# EAGLE board proiect2025 v21_pcb (EAGLE 9.7.0)
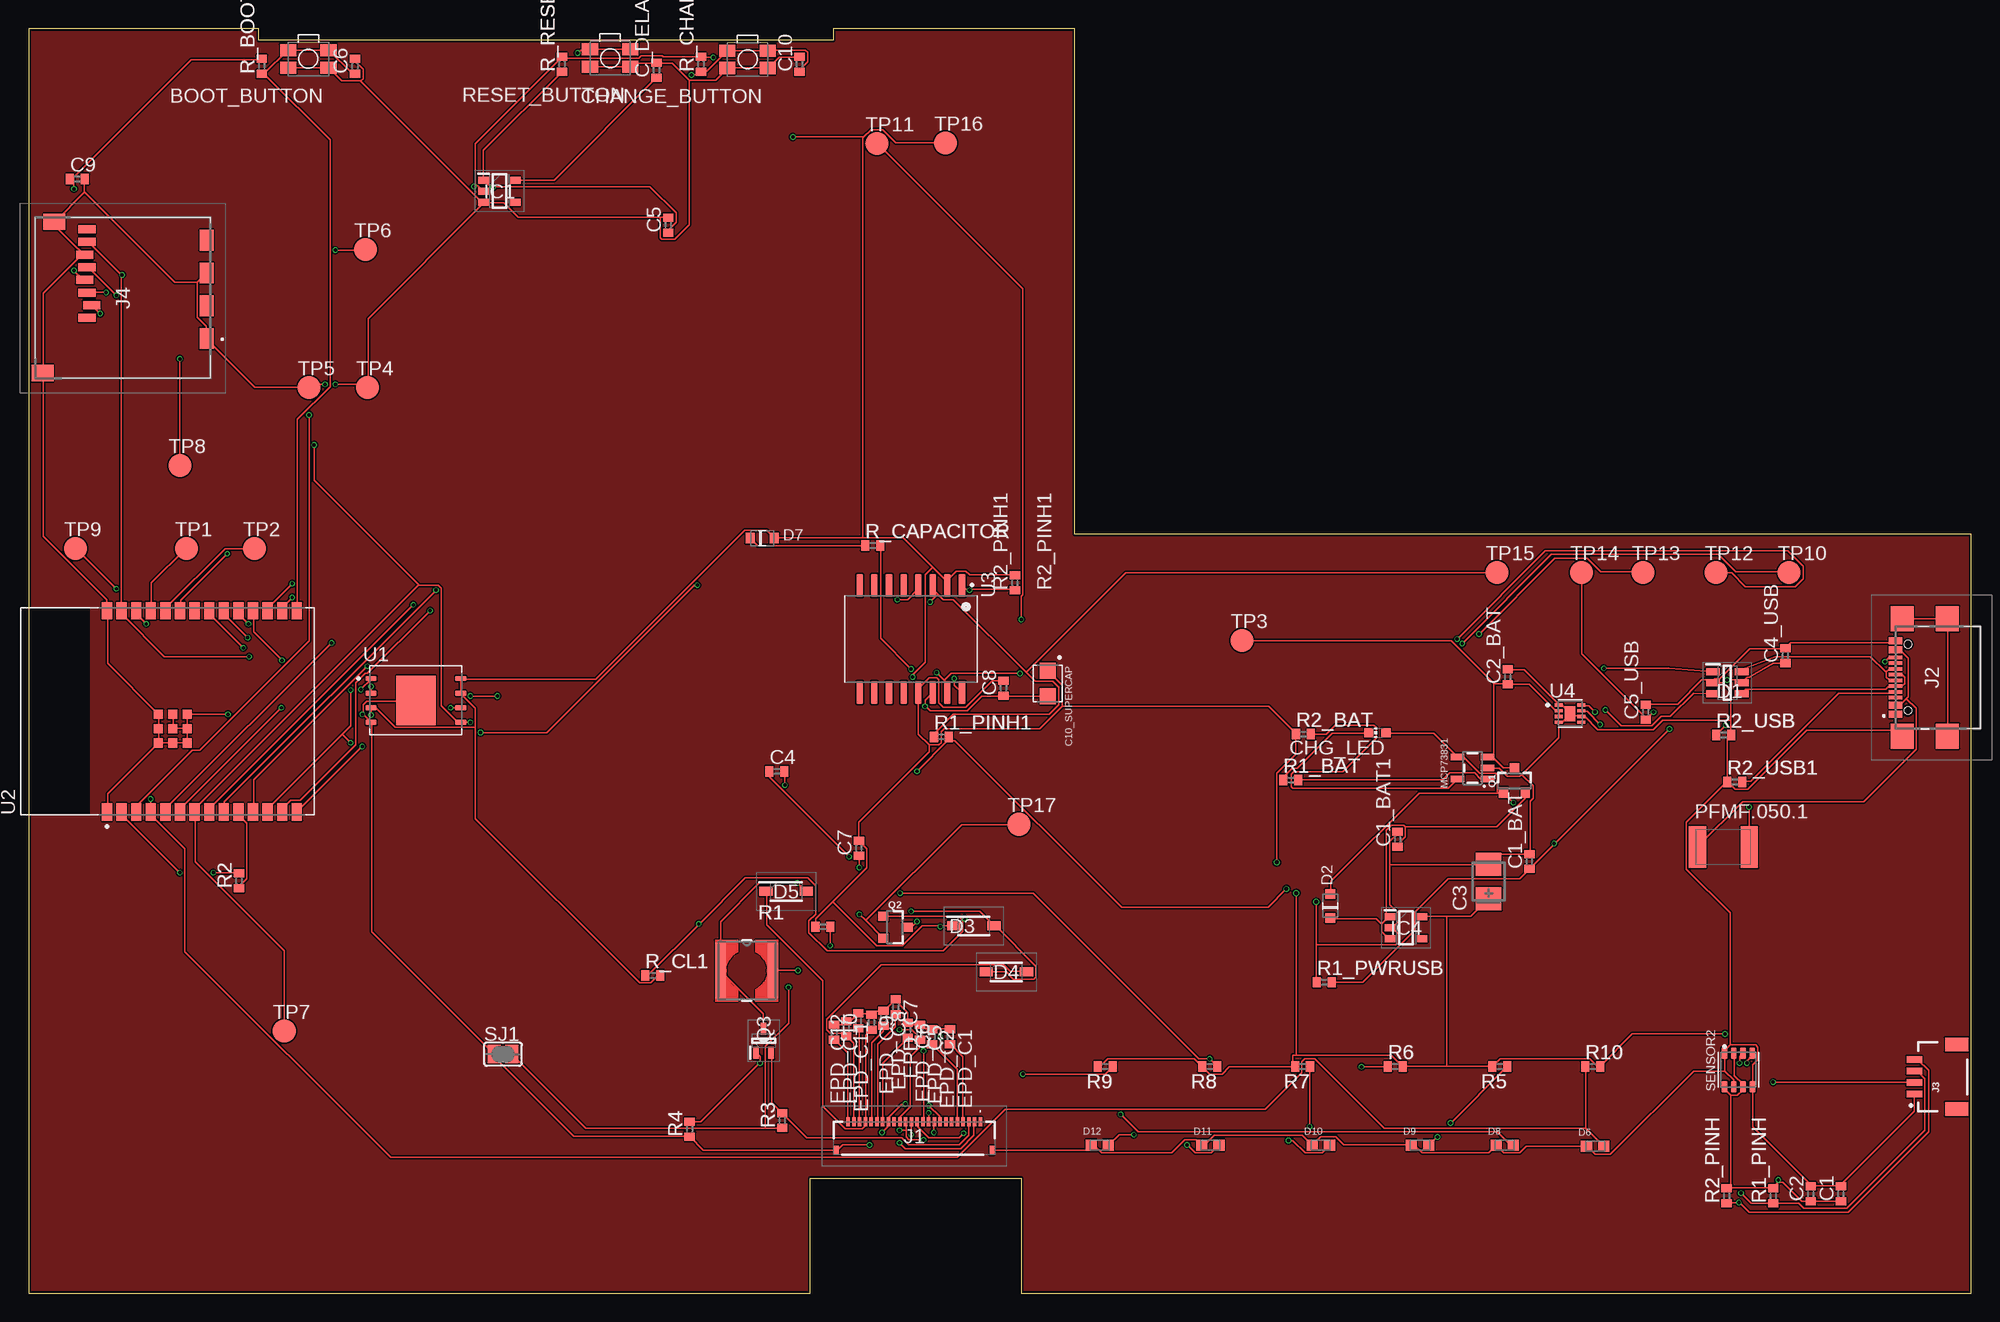
[diagram p0: board, top side]
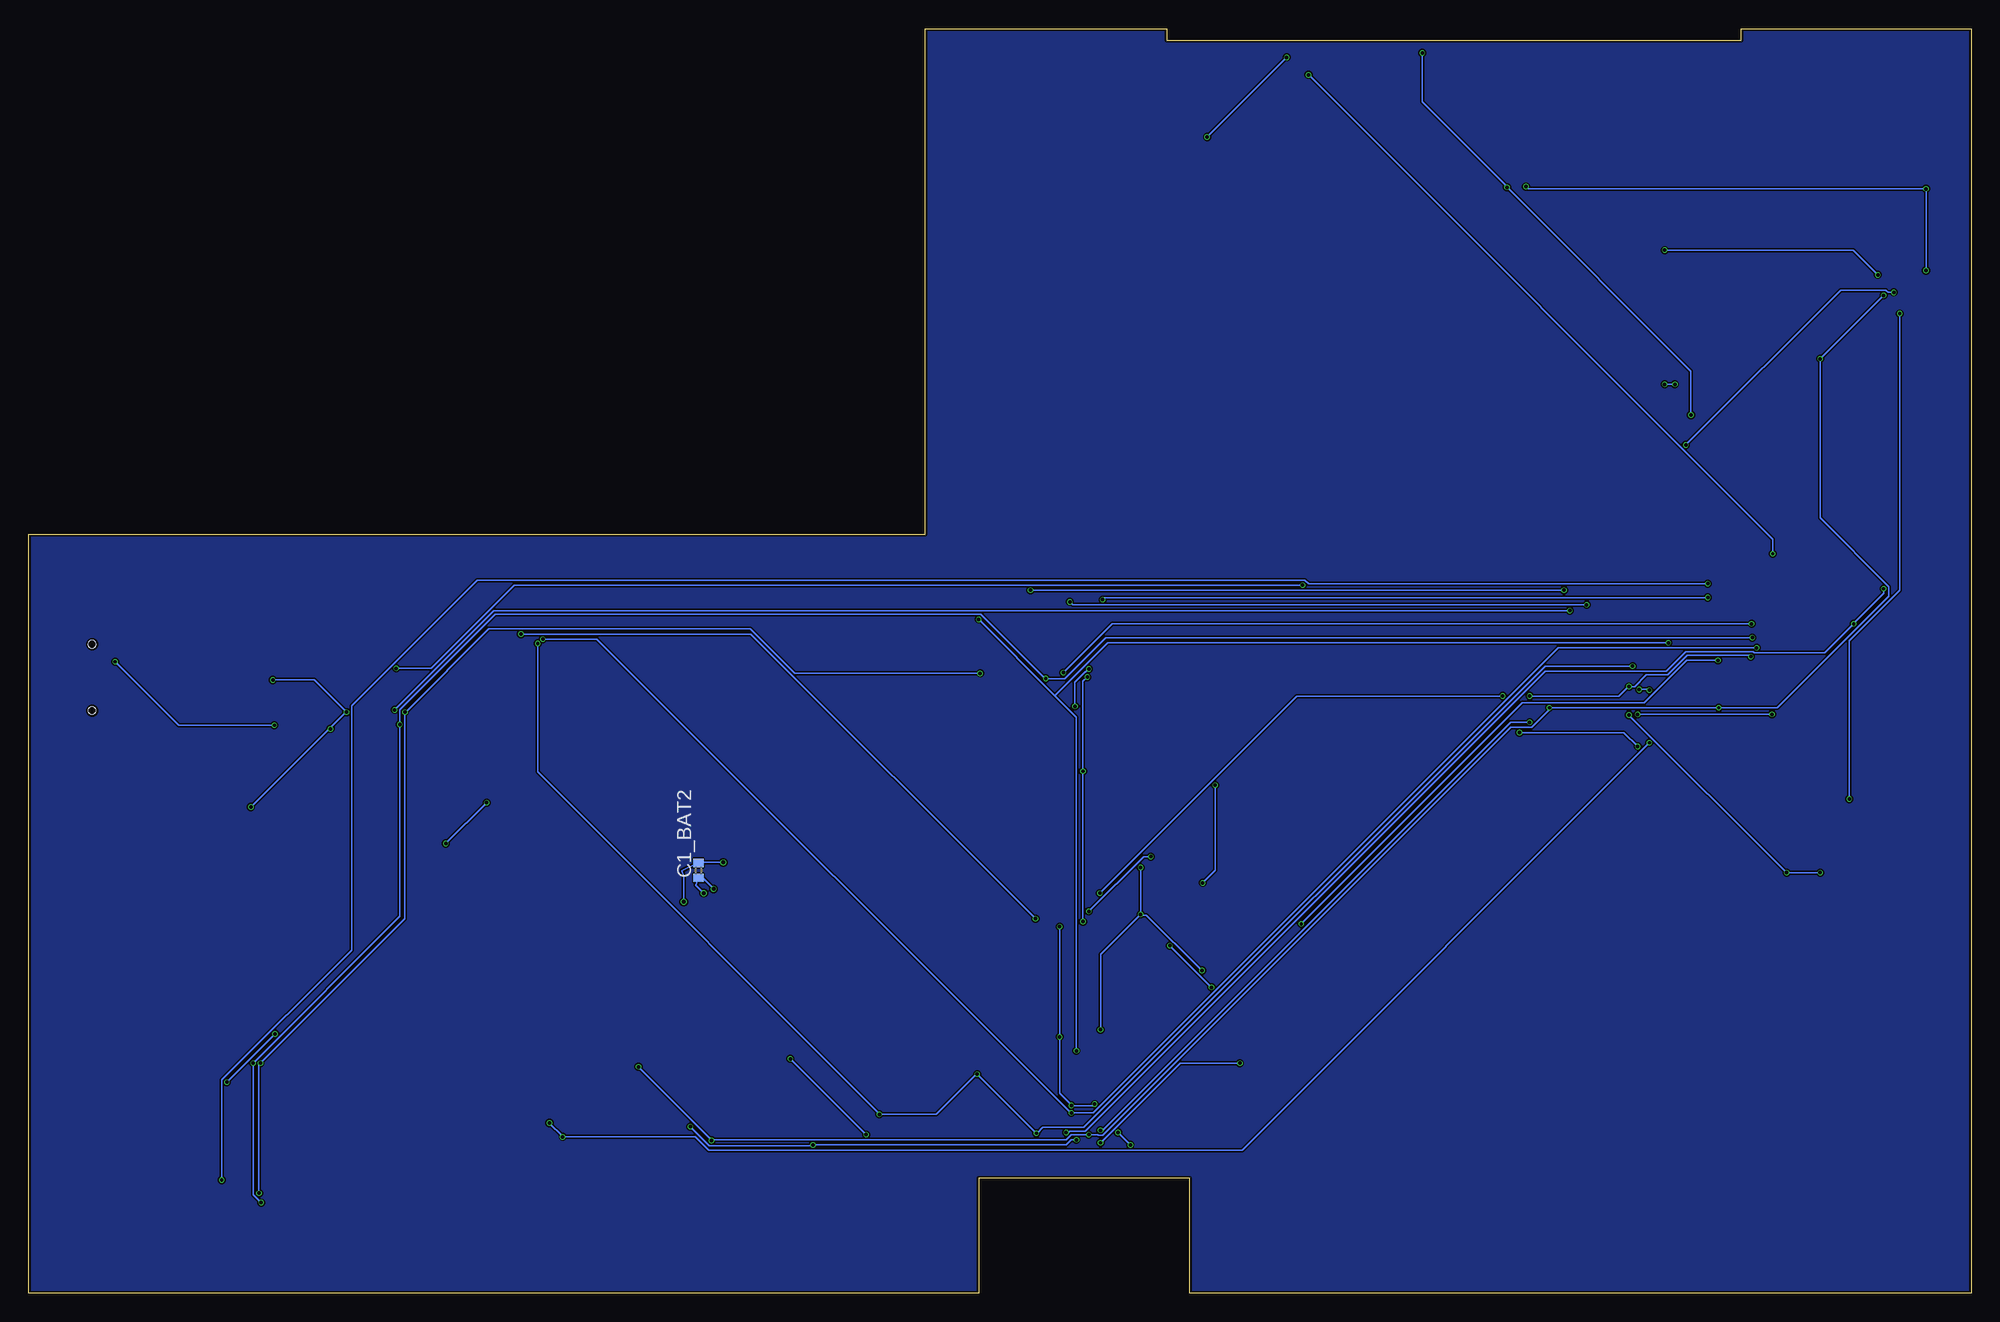
[diagram p1: board, bottom side, seen from below]

Size 169 x 110 mm. Coordinates in mm from the lower left corner, seen from the top.
Outline: 0,110 0,0 68,0 68,10 86.37,10 86.37,0 169,0 169,66 91,66 91,110 70,110 70,109 20,109 20,110 0,110
Copper layers (1*16): Top 0.035mm / dielectric 1.6mm / Bottom 0.035mm
Design rules "jlcpcb-2layers.dru": minimum track width 5mil, minimum drill 0.3mm, track to track 5mil, track to pad 5mil, pad to pad 5mil, via to via 5mil, smd to smd 5mil, copper to edge 0.2mm, drill to drill 6mil, minimum pad ring 10mil, minimum via ring 3mil, stop-mask expansion 4mil, vias tented up to drill 0mil, thermal gap 10mil
Net classes: 1 power: width 0.3 mm; 2 rest: width 0.15 mm

## Footprints (pad centres in the part's own frame; a part is rotated, then mirrored left to right if it is on the bottom)
MYBUTTON = smd 1.4 x 1.05: 1 1.75,0.75; 2 -1.75,0.75; 3 -1.75,-0.75; 4 1.75,-0.75
EAGLE-LTSPICE_C0402 = smd 0.7 x 0.9: 1 -0.65,0; 2 0.65,0
RCL_CT3528 = smd 2 x 2.2: + -1.5,0; - 1.5,0
CAPCP3225X100N = smd 1.4 x 1.4: 1 -1.1,0; 2 1.1,0
ADAFRUIT_CHIP-LED0603 = smd 0.8 x 0.8: A 0,-0.75; C 0,0.75
SOT95P280X145-6N = smd 1.2 x 0.6: 1 -1.25,0.95; 2 -1.25,0; 3 -1.25,-0.95; 4 1.25,-0.95; 5 1.25,0; 6 1.25,0.95
ESP32_WROVER_AVX---SD0805S020S1R0_AVX_SD0805S020S1R0_0 = smd 0.8 x 0.9: 1 -1.05,0; 2 1.05,0
SOD3716X135N = smd 1.15 x 0.8: 1 -1.75,0; 2 1.75,0
DIOC1608X36N = smd 0.97 x 0.94: 1 -0.75,0; 2 0.75,0
SOT95P280X125-5N = smd 0.9 x 0.6: 1 -1.4,0.95; 2 -1.4,0; 3 -1.4,-0.95; 4 1.4,-0.95; 5 1.4,0.95
SOT95P280X120-5N = smd 0.9 x 0.6: 1 -1.4,0.95; 2 -1.4,0; 3 -1.4,-0.95; 4 1.4,-0.95; 5 1.4,0.95
FH34SRJ24S05SH99 = smd 0.3 x 0.8: 1 5.75,1.45; 2 5.25,1.45; 3 4.75,1.45; 4 4.25,1.45; 5 3.75,1.45; 6 3.25,1.45; 7 2.75,1.45; 8 2.25,1.45; 9 1.75,1.45; 10 1.25,1.45; 11 0.75,1.45; 12 0.25,1.45; 13 -0.25,1.45; 14 -0.75,1.45; 15 -1.25,1.45; 16 -1.75,1.45; 17 -2.25,1.45; 18 -2.75,1.45; 19 -3.25,1.45; 20 -3.75,1.45; 21 -4.25,1.45; 22 -4.75,1.45; 23 -5.25,1.45; 24 -5.75,1.45 | smd 0.4 x 0.8: MP1 6.75,-1.05; MP2 -6.75,-1.05
SAMACSYS_PARTS_USB4110GFA = smd 0.3 x 1.15: A1 -3.35,3.678; A4 -2.55,3.678; A5 -1.25,3.678; A6 -0.25,3.678; A7 0.25,3.678; A8 1.25,3.678; A9 2.55,3.678; A12 3.35,3.678; B1 3.05,3.678; B4 2.25,3.678; B5 1.75,3.678; B6 0.75,3.678; B7 -0.75,3.678; B8 -1.75,3.678; B9 -2.25,3.678; B12 -3.05,3.678 | smd 2.18 x 2: MP1 -5.11,-0.827; MP2 5.11,-0.827; MP3 -5.11,3.103; MP4 5.11,3.103 | hole 0.65: -2.89,2.603; 2.89,2.603
JST04_1MM_RA = smd 0.6 x 1.35: 1 -1.5,0; 2 -0.5,0; 3 0.5,0; 4 1.5,0 | smd 1.2 x 2: NC1 2.8,-3.675; NC2 -2.8,-3.675
112ATAARR03ATTEND = smd 1.8 x 1.2: G1 10.6,10.4; G2 4.9,10.4; S1 7.75,10.4; S2 2.05,10.4 | smd 1.4 x 1.9: G3 13.6,-3.85; G4 0.45,-2.85 | smd 0.7 x 1.5: P1 8.8,0; P2 7.7,0.4; P3 6.6,0; P4 5.5,-0.2; P5 4.4,0; P6 3.3,-0.2; P7 2.2,0; P8 1.1,0
IND_4828-WE-TPC_WRE = smd 0.889 x 4.826: 1 -2.286,0; 2 2.286,0
ESP32_WROVER_SPARKFUN-IC-POWER_SOT23-5 = smd 0.55 x 1.2: 1 -0.95,-1.3; 2 0,-1.3; 3 0.95,-1.3; 4 0.95,1.3; 5 -0.95,1.3
ESP32C6_VARISTOR_CT/CN1812 = smd 1.5 x 3.6: 1 -2.25,0; 2 2.25,0
ESP32_WROVER_SPARKFUN-DISCRETESEMI_SOT23-3 = smd 0.8 x 0.9: 1 -0.95,-1; 2 0.95,-1; 3 0,1.1
SOT65P210X110-3N = smd 1.05 x 0.5: 1 -1.05,0.65; 2 -1.05,-0.65; 3 1.05,0
ESP32_WROVER_EAGLE-LTSPICE_R0402 = smd 0.7 x 0.9: 1 -0.65,0; 2 0.65,0
ESP32_WROVER_BME680_PSON80P300X300X100-8N = smd 1.016 x 0.5: 1 1.458,1.2; 2 1.458,0.4; 3 1.458,-0.4; 4 1.458,-1.2; 5 -1.458,-1.22; 6 -1.458,-0.4; 7 -1.458,0.4; 8 -1.458,1.2
SJ = smd 1.168 x 1.6: 1 -0.762,0; 2 0.762,0
TP20R = smd 2 x 2: TP 0,0
SON127P600X800X80-9N = smd 0.94 x 0.44: 1 -3.895,1.905; 2 -3.895,0.635; 3 -3.895,-0.635; 4 -3.895,-1.905; 5 3.895,-1.905; 6 3.895,-0.635; 7 3.895,0.635; 8 3.895,1.905 | smd 3.4 x 4.3: 9 0,0
XCVR_ESP32-C6-WROOM-1-N8 = smd 1.5 x 0.9: 1 -8.75,5.26; 2 -8.75,3.99; 3 -8.75,2.72; 4 -8.75,1.45; 5 -8.75,0.18; 6 -8.75,-1.09; 7 -8.75,-2.36; 8 -8.75,-3.63; 9 -8.75,-4.9; 10 -8.75,-6.17; 11 -8.75,-7.44; 12 -8.75,-8.71; 13 -8.75,-9.98; 14 -8.75,-11.25; 15 8.75,-11.25; 16 8.75,-9.98; 17 8.75,-8.71; 18 8.75,-7.44; 19 8.75,-6.17; 20 8.75,-4.9; 21 8.75,-3.63; 22 8.75,-2.36; 23 8.75,-1.09; 24 8.75,0.18; 25 8.75,1.45; 26 8.75,2.72; 27 8.75,3.99; 28 8.75,5.26 | smd 0.8 x 0.8: 29_1 -2.755,0.79; 29_2 -1.505,0.79; 29_3 -0.255,0.79; 29_4 -2.755,-0.46; 29_5 -1.505,-0.46; 29_6 -0.255,-0.46; 29_7 -2.755,-1.71; 29_8 -1.505,-1.71; 29_9 -0.255,-1.71
SOIC127P1032X265-16N = smd 2.05 x 0.59: 1 -4.655,4.445; 2 -4.655,3.175; 3 -4.655,1.905; 4 -4.655,0.635; 5 -4.655,-0.635; 6 -4.655,-1.905; 7 -4.655,-3.175; 8 -4.655,-4.445; 9 4.655,-4.445; 10 4.655,-3.175; 11 4.655,-1.905; 12 4.655,-0.635; 13 4.655,0.635; 14 4.655,1.905; 15 4.655,3.175; 16 4.655,4.445
SON50P200X200X80-9N = smd 0.76 x 0.27: 1 -0.985,0.75; 2 -0.985,0.25; 3 -0.985,-0.25; 4 -0.985,-0.75; 5 0.985,-0.75; 6 0.985,-0.25; 7 0.985,0.25; 8 0.985,0.75 | smd 0.9 x 1.3: 9 0,0

## Placement (x,y rotation side)
BOOT_BUTTON  BUTTON_CUSYOMV1  [MYBUTTON]  24.33,107.37 180 top
C1  100nF  [EAGLE-LTSPICE_C0402]  157.66,8.63 90 top
C1_BAT  4.7uF  [EAGLE-LTSPICE_C0402]  130.56,37.55 90 top
C1_BAT1  4.7uF  [EAGLE-LTSPICE_C0402]  119.09,39.47 90 top
C1_BAT2  4.7uF  [EAGLE-LTSPICE_C0402]  110.73,36.77 90 bottom
C2  100nF  [EAGLE-LTSPICE_C0402]  155.04,8.63 90 top
C2_BAT  4.7uF  [EAGLE-LTSPICE_C0402]  128.68,53.63 90 top
C3  100uF TANT  [RCL_CT3528]  127.01,35.8 90 top
C4  4.7uF/25V  [EAGLE-LTSPICE_C0402]  65.09,45.39 0 top
C4_USB  100nF  [EAGLE-LTSPICE_C0402]  152.83,55.47 90 top
C5  1uF  [EAGLE-LTSPICE_C0402]  55.63,92.91 90 top
C5_USB  4.7uF  [EAGLE-LTSPICE_C0402]  140.68,50.55 90 top
C6  100nF  [EAGLE-LTSPICE_C0402]  28.38,106.72 90 top
C7  10uF  [EAGLE-LTSPICE_C0402]  72.22,38.71 90 top
C8  100nF  [EAGLE-LTSPICE_C0402]  84.8,52.63 90 top
C9  100nF  [EAGLE-LTSPICE_C0402]  4.23,96.93 0 top
C10  100nF  [EAGLE-LTSPICE_C0402]  67.06,106.91 90 top
C10_SUPERCAP  CPH3225A  [CAPCP3225X100N]  88.66,53.04 270 top
C_DELAY  100nF  [EAGLE-LTSPICE_C0402]  54.61,106.39 90 top
CHANGE_BUTTON  BUTTON_CUSYOMV1  [MYBUTTON]  62.54,107.33 180 top
CHG_LED  [ADAFRUIT_CHIP-LED0603]  117.34,48.75 90 top
D1  USBLC6-2SC6Y  [SOT95P280X145-6N]  147.78,53.1 0 top
D2  ESP32_WROVER_AVX---SD0805S020S1R0_AVX_SD0805S020S1R0_0_0AVX_SD0805S020S1R0_0_0  [ESP32_WROVER_AVX---SD0805S020S1R0_AVX_SD0805S020S1R0_0]  113.23,33.68 90 top
D3  MBR0530  [SOD3716X135N]  82.22,31.95 0 top
D4  MBR0530  [SOD3716X135N]  85.06,27.95 0 top
D5  MBR0530  [SOD3716X135N]  65.9,34.95 0 top
D6  PGB1010603MR  [DIOC1608X36N]  136.28,12.78 0 top
D7  ESP32_WROVER_AVX---SD0805S020S1R0_AVX_SD0805S020S1R0_0_0AVX_SD0805S020S1R0_0_0  [ESP32_WROVER_AVX---SD0805S020S1R0_AVX_SD0805S020S1R0_0]  63.82,65.68 0 top
D8  PGB1010603MR  [DIOC1608X36N]  128.42,12.87 0 top
D9  PGB1010603MR  [DIOC1608X36N]  121.04,12.87 0 top
D10  PGB1010603MR  [DIOC1608X36N]  112.42,12.87 0 top
D11  PGB1010603MR  [DIOC1608X36N]  102.8,12.87 0 top
D12  PGB1010603MR  [DIOC1608X36N]  93.18,12.87 0 top
EPD_C1  1uF/50V  [EAGLE-LTSPICE_C0402]  80.16,22.32 270 top
EPD_C2  1uF/50V  [EAGLE-LTSPICE_C0402]  78.58,22.32 270 top
EPD_C5  0.1uF/50V  [EAGLE-LTSPICE_C0402]  77.53,22.7 270 top
EPD_C6  1uF/50V  [EAGLE-LTSPICE_C0402]  76.48,22.86 270 top
EPD_C7  1uF/50V  [EAGLE-LTSPICE_C0402]  75.42,24.92 270 top
EPD_C8  1uF/50V  [EAGLE-LTSPICE_C0402]  74.37,23.92 270 top
EPD_C9  1uF/50V  [EAGLE-LTSPICE_C0402]  73.32,23.55 270 top
EPD_C10  1uF/50V  [EAGLE-LTSPICE_C0402]  72.17,23.7 270 top
EPD_C11  1uF/50V  [EAGLE-LTSPICE_C0402]  71.12,23.02 270 top
EPD_C12  1uF/50V  [EAGLE-LTSPICE_C0402]  70.07,22.7 270 top
IC1  BD5229G-TR  [SOT95P280X125-5N]  40.95,95.87 0 top
IC4  XC6220A331MR-G  [SOT95P280X120-5N]  119.83,31.79 0 top
J1  FH34SRJ-24S-0.5SH_99_  [FH34SRJ24S05SH99]  77.04,13.47 0 top
J2  SAMACSYS_PARTS_USB4110-GF-A  [SAMACSYS_PARTS_USB4110GFA]  166.09,53.56 90 top
J3  QWIIC_RIGHT_ANGLE  [JST04_1MM_RA]  164.05,18.82 90 top
J4  112A-TAAR-R03_ATTEND  [112ATAARR03ATTEND]  5.08,93.65 270 top
L1  68uH  [IND_4828-WE-TPC_WRE]  62.47,28.05 0 top
MCP73831  ESP32_WROVER_SPARKFUN-IC-POWER_MCP73831  [ESP32_WROVER_SPARKFUN-IC-POWER_SOT23-5]  125.61,45.69 90 top
PFMF.050.1  ESP32C6_VARISTORCN1812  [ESP32C6_VARISTOR_CT/CN1812]  147.44,38.8 0 top
Q1  20V/4.2A/52mΩ/1.4W  [ESP32_WROVER_SPARKFUN-DISCRETESEMI_SOT23-3]  129.26,44.56 0 top
Q2  20V/4.2A/52mΩ/1.4W  [ESP32_WROVER_SPARKFUN-DISCRETESEMI_SOT23-3]  75.34,31.83 270 top
Q3  SI1308EDL-T1-GE3  [SOT65P210X110-3N]  63.93,21.95 90 top
R1  [ESP32_WROVER_EAGLE-LTSPICE_R0402]  69.1,31.87 0 top
R1_BAT  200  [ESP32_WROVER_EAGLE-LTSPICE_R0402]  109.79,44.63 0 top
R1_PINH  10K  [ESP32_WROVER_EAGLE-LTSPICE_R0402]  151.77,8.47 90 top
R1_PINH1  10K  [ESP32_WROVER_EAGLE-LTSPICE_R0402]  79.41,48.39 0 top
R1_PWRUSB  100k  [ESP32_WROVER_EAGLE-LTSPICE_R0402]  112.72,27.04 0 top
R2  [ESP32_WROVER_EAGLE-LTSPICE_R0402]  18.29,35.87 90 top
R2_BAT  2k  [ESP32_WROVER_EAGLE-LTSPICE_R0402]  110.9,48.63 0 top
R2_PINH  10K  [ESP32_WROVER_EAGLE-LTSPICE_R0402]  147.72,8.47 90 top
R2_PINH1  10K  [ESP32_WROVER_EAGLE-LTSPICE_R0402]  85.79,61.81 90 top
R2_USB  5k1  [ESP32_WROVER_EAGLE-LTSPICE_R0402]  147.45,48.55 0 top
R2_USB1  5k1  [ESP32_WROVER_EAGLE-LTSPICE_R0402]  148.41,44.47 0 top
R3  0.47  [ESP32_WROVER_EAGLE-LTSPICE_R0402]  65.55,15.02 90 top
R4  10k  [ESP32_WROVER_EAGLE-LTSPICE_R0402]  57.5,14.26 90 top
R5  10K  [ESP32_WROVER_EAGLE-LTSPICE_R0402]  127.98,19.71 180 top
R6  10K  [ESP32_WROVER_EAGLE-LTSPICE_R0402]  118.9,19.71 0 top
R7  10K  [ESP32_WROVER_EAGLE-LTSPICE_R0402]  110.82,19.71 180 top
R8  10K  [ESP32_WROVER_EAGLE-LTSPICE_R0402]  102.74,19.71 180 top
R9  10K  [ESP32_WROVER_EAGLE-LTSPICE_R0402]  93.66,19.71 180 top
R10  10K  [ESP32_WROVER_EAGLE-LTSPICE_R0402]  136.06,19.71 0 top
R_BOOT  10K  [ESP32_WROVER_EAGLE-LTSPICE_R0402]  20.28,106.72 90 top
R_CAPACITOR  15  [ESP32_WROVER_EAGLE-LTSPICE_R0402]  73.42,65.04 0 top
R_CHANGE  10K  [ESP32_WROVER_EAGLE-LTSPICE_R0402]  58.48,106.91 90 top
R_CL1  10K  [ESP32_WROVER_EAGLE-LTSPICE_R0402]  54.28,27.63 0 top
R_RESET  10K  [ESP32_WROVER_EAGLE-LTSPICE_R0402]  46.4,106.91 90 top
RESET_BUTTON  BUTTON_CUSYOMV1  [MYBUTTON]  50.58,107.45 180 top
SENSOR2  ESP32_WROVER_BME680_BME680  [ESP32_WROVER_BME680_PSON80P300X300X100-8N]  148.74,19.42 90 top
SJ1  [SJ]  41.26,20.79 0 top
TP1  TPTP20R  [TP20R]  13.71,64.79 0 top
TP2  TPTP20R  [TP20R]  19.63,64.79 0 top
TP3  TPTP20R  [TP20R]  105.55,56.79 0 top
TP4  TPTP20R  [TP20R]  29.47,78.79 0 top
TP5  TPTP20R  [TP20R]  24.39,78.79 0 top
TP6  TPTP20R  [TP20R]  29.31,90.79 0 top
TP7  TPTP20R  [TP20R]  22.23,22.79 0 top
TP8  TPTP20R  [TP20R]  13.15,72.02 0 top
TP9  TPTP20R  [TP20R]  4.07,64.79 0 top
TP10  TPTP20R  [TP20R]  153.15,62.71 0 top
TP11  TPTP20R  [TP20R]  73.79,100.02 0 top
TP12  TPTP20R  [TP20R]  146.8,62.71 0 top
TP13  TPTP20R  [TP20R]  140.45,62.71 0 top
TP14  TPTP20R  [TP20R]  135.1,62.71 0 top
TP15  TPTP20R  [TP20R]  127.75,62.71 0 top
TP16  TPTP20R  [TP20R]  79.78,100.08 0 top
TP17  TPTP20R  [TP20R]  86.14,40.79 0 top
U1  W25Q512JVEIQ  [SON127P600X800X80-9N]  33.69,51.56 0 top
U2  ESP32-C6-WROOM-1-N8  [XCVR_ESP32-C6-WROOM-1-N8]  12.07,50.61 90 top
U3  DS3231SN#  [SOIC127P1032X265-16N]  76.75,56.91 270 top
U4  MAX17048G+T10  [SON50P200X200X80-9N]  134.1,50.42 0 top

## Library data of the parts
BOOT_BUTTON CHANGE_BUTTON CHG_LED PFMF.050.1 RESET_BUTTON SJ1 TP1-TP17 = DeskAssistant v19 v1
C1 C1_BAT C1_BAT1 C1_BAT2 C2 C2_BAT C4 C4_USB C5 C5_USB C6-C10 C_DELAY EPD_C1 EPD_C2 EPD_C5-EPD_C12 = DeskAssistant v19 v1; SPICEMODEL: NONE; SPICEPREFIX: C
C3 = DeskAssistant v19 v1; SPICEPREFIX: C
C10_SUPERCAP = DeskAssistant v19 v1; AVAILABILITY: Not in stock; CHECK_PRICES: https://www.snapeda.com/parts/CPH3225A/Seiko+Instruments/view-part/?ref=eda; DESCRIPTION: 11 mF (EDLC) Supercapacitor 3.3 V 1210 (3225 Metric) - -; MF: Seiko Instruments; MP: CPH3225A; PACKAGE: 1210 Seiko; PRICE: None; PURCHASE-URL: https://www.snapeda.com/api/url_track_click_mouser/?unipart_id=562593&manufacturer=Seiko Instruments&part_name=CPH3225A&search_term=None; SNAPEDA_LINK: https://www.snapeda.com/parts/CPH3225A/Seiko+Instruments/view-part/?ref=snap
D1 = DeskAssistant v19 v1; AVAILABILITY: In Stock; CHECK_PRICES: https://www.snapeda.com/parts/USBLC6-2SC6Y/STMicroelectronics/view-part/?ref=eda; DESCRIPTION: 17V Clamp 5A (8/20µs) Ipp Tvs Diode Surface Mount SOT-23-6; MF: STMicroelectronics; MP: USBLC6-2SC6Y; PACKAGE: SOT-23-6 STMicroelectronics; PRICE: None; SNAPEDA_LINK: https://www.snapeda.com/parts/USBLC6-2SC6Y/STMicroelectronics/view-part/?ref=snap
D2 D7 = DeskAssistant v19 v1; CENTROID_NOT_SPECIFIED: No; DATASHEET: http://datasheets.avx.com/schottky.pdf; DIGIKEY_DESCRIPTION: DIODE SCHOTTKY 20V 1A 0805; DIGIKEY_PART_NUMBER: 478-7800-1-ND; LEAD_FREE: yes; MF: AVX; MOUSER_PART_NUMBER: 581-SD0805S020S1R0; PACKAGE: 0805 (2012 metric); PREFIX: D; ROHS: yes; TEMPERATURE_RANGE_HIGH: +125°C; TEMPERATURE_RANGE_LOW: -55°C
D3-D5 = DeskAssistant v19 v1; AVAILABILITY: In Stock; CHECK_PRICES: https://www.snapeda.com/parts/MBR0530/Onsemi/view-part/?ref=eda; DESCRIPTION: Diode Schottky 30 V 500mA Surface Mount SOD-123; MF: ON Semiconductor; MP: MBR0530; PACKAGE: SOD-123-2 ON Semiconductor; PRICE: None; PURCHASE-URL: https://www.snapeda.com/api/url_track_click_mouser/?unipart_id=179458&manufacturer=ON Semiconductor&part_name=MBR0530&search_term=None; SNAPEDA_LINK: https://www.snapeda.com/parts/MBR0530/Onsemi/view-part/?ref=snap
D6 D8-D12 = DeskAssistant v19 v1; AVAILABILITY: In Stock; CHECK_PRICES: https://www.snapeda.com/parts/PGB1010603MR/Littelfuse/view-part/?ref=eda; DESCRIPTION: 150V (Typ) Clamp - Ipp Tvs Diode Surface Mount 0603 (1608 Metric); MF: Littelfuse Inc.; MP: PGB1010603MR; PACKAGE: 0603 Littelfuse Inc.; PRICE: None; PURCHASE-URL: https://www.snapeda.com/api/url_track_click_mouser/?unipart_id=5659453&manufacturer=Littelfuse Inc.&part_name=PGB1010603MR&search_term=None; SNAPEDA_LINK: https://www.snapeda.com/parts/PGB1010603MR/Littelfuse/view-part/?ref=snap
IC1 = DeskAssistant v19 v1; DESCRIPTION: Voltage Detector with Adjustable Delay Time: CMOS processes are utilized to develop high precision, low current consumption CMOS reset ICs that allow arbitrary setting of the delay time. The extensive lineup includes both Nch Open Drain and CMOS output types in a wide range of detection voltages (from 2.3V to 6.0V, in 0.1V steps), enabling selection of the ideal solution based on customer requirements. In addition, the entire series is of course both lead-free and RoHS-compliant.; HEIGHT: 1.25mm; MANUFACTURER_NAME: ROHM Semiconductor; MANUFACTURER_PART_NUMBER: BD5229G-TR; MOUSER_PART_NUMBER: 755-BD5229G-TR; MOUSER_PRICE-STOCK: https://www.mouser.co.uk/ProductDetail/ROHM-Semiconductor/BD5229G-TR?qs=4kLU8WoGk0vvnhrrYwdszw%3D%3D
IC4 = DeskAssistant v19 v1; DESCRIPTION: LDO Voltage Regulators; HEIGHT: 1.2mm; MANUFACTURER_NAME: Torex; MANUFACTURER_PART_NUMBER: XC6220A331MR-G; MOUSER_PART_NUMBER: 865-XC6220A331MR-G; MOUSER_PRICE-STOCK: https://www.mouser.co.uk/ProductDetail/Torex-Semiconductor/XC6220A331MR-G?qs=AsjdqWjXhJ8ZSWznL1J0gg%3D%3D
J1 = DeskAssistant v19 v1; DESCRIPTION: 24 Position FFC, FPC Connector Contacts, Top and Bottom 0.020" (0.50mm) Surface Mount, Right Angle; HEIGHT: 1.1mm; MANUFACTURER_NAME: Hirose; MANUFACTURER_PART_NUMBER: FH34SRJ-24S-0.5SH(99); MOUSER_PART_NUMBER: 798-FH34SRJ24S05SH99; MOUSER_PRICE-STOCK: https://www.mouser.co.uk/ProductDetail/Hirose-Connector/FH34SRJ-24S-0.5SH99?qs=vcbW%252B4%252BSTIpKBl5ap9J8Fw%3D%3D
J2 = DeskAssistant v19 v1; DESCRIPTION: CONN USB 2.0 TYPE-C R/A SMT; HEIGHT: 3.26mm; MANUFACTURER_NAME: GCT (GLOBAL CONNECTOR TECHNOLOGY); MANUFACTURER_PART_NUMBER: USB4110-GF-A; MOUSER_PART_NUMBER: 640-USB4110-GF-A; MOUSER_PRICE-STOCK: https://www.mouser.co.uk/ProductDetail/GCT/USB4110-GF-A?qs=KUoIvG%2F9IlYiZvIXQjyJeA%3D%3D
J3 = DeskAssistant v19 v1; PROD_ID: CONN-13694
J4 = DeskAssistant v19 v1; DESCRIPTION: Micro SD Card Socket, Push-Push Type, Top Mount, SMT, H=1.83mm, 10u; HEIGHT: 1.9mm; MANUFACTURER_NAME: ATTEND; MANUFACTURER_PART_NUMBER: 112A-TAAR-R03 ATTEND
L1 = DeskAssistant v19 v1; COPYRIGHT: Copyright (C) 2024 Ultra Librarian. All rights reserved.; MANUFACTURER_PART_NUMBER: 744043680; MFR_NAME: Wurth Electronics
MCP73831 = DeskAssistant v19 v1; PROD_ID: IC-09995
Q1 Q2 = DeskAssistant v19 v1; PROD_ID: TRAN-14388
Q3 = DeskAssistant v19 v1; AVAILABILITY: In Stock; CHECK_PRICES: https://www.snapeda.com/parts/SI1308EDL-T1-GE3/Vishay+Siliconix/view-part/?ref=eda; DESCRIPTION: Si1308EDL-T1-GE3 N-channel MOSFET Transistor, 1.5 A, 30 V, 3-Pin SC-70 | Siliconix / Vishay SI1308EDL-T1-GE3; MF: Vishay Siliconix; MP: SI1308EDL-T1-GE3; PACKAGE: SOT-323 Vishay Semiconductor; PRICE: None; PURCHASE-URL: https://www.snapeda.com/api/url_track_click_mouser/?unipart_id=274603&manufacturer=Vishay Siliconix&part_name=SI1308EDL-T1-GE3&search_term=None; SNAPEDA_LINK: https://www.snapeda.com/parts/SI1308EDL-T1-GE3/Vishay+Siliconix/view-part/?ref=snap
R1 R1_BAT R1_PINH R1_PINH1 R1_PWRUSB R2 R2_BAT R2_PINH R2_PINH1 R2_USB R2_USB1 R3-R10 R_BOOT R_CAPACITOR R_CHANGE R_CL1 R_RESET = DeskAssistant v19 v1; SPICEMODEL: NONE; SPICEPREFIX: R
SENSOR2 = DeskAssistant v19 v1; AVAILABILITY: Unavailable; DESCRIPTION: Integrated Environmental Unit; MF: Bosch Sensortec; MP: BME680; PACKAGE: LGA-8 Bosch Tools; PRICE: None
U1 = DeskAssistant v19 v1; AVAILABILITY: In Stock; CHECK_PRICES: https://www.snapeda.com/parts/W25Q512JVEIQ/Winbond+Electronics/view-part/?ref=eda; DESCRIPTION: FLASH - NOR Memory IC 512Mb (64M x 8) SPI - Quad I/O 133 MHz 8-WSON (8x6); MF: Winbond Electronics; MP: W25Q512JVEIQ; PACKAGE: Package; PRICE: None; SNAPEDA_LINK: https://www.snapeda.com/parts/W25Q512JVEIQ/Winbond+Electronics/view-part/?ref=snap
U2 = DeskAssistant v19 v1; AVAILABILITY: In Stock; CHECK_PRICES: https://www.snapeda.com/parts/ESP32-C6-WROOM-1-N8/Espressif+Systems/view-part/?ref=eda; DESCRIPTION: Multiprotocol Modules ESP32-C6 module, Wi-Fi 6 in 2.4 GHz band, Bluetooth 5, Zigbee 3.0 and Thread. ESP34-WROOM Compatible - ENGINEERING SAMPLE; MF: Espressif Systems; MP: ESP32-C6-WROOM-1-N8; PACKAGE: None; PRICE: None; SNAPEDA_LINK: https://www.snapeda.com/parts/ESP32-C6-WROOM-1-N8/Espressif+Systems/view-part/?ref=snap
U3 = DeskAssistant v19 v1; AVAILABILITY: In Stock; CHECK_PRICES: https://www.snapeda.com/parts/DS3231SN%23/Analog+Devices/view-part/?ref=eda; DESCRIPTION: Extremely Accurate I²C-Integrated RTC/TCXO/Crystal; MF: Analog Devices; MP: DS3231SN#; PACKAGE: SOIC-16 Maxim; PRICE: None; PURCHASE-URL: https://www.snapeda.com/api/url_track_click_mouser/?unipart_id=99048&manufacturer=Analog Devices&part_name=DS3231SN#&search_term=None; SNAPEDA_LINK: https://www.snapeda.com/parts/DS3231SN%23/Analog+Devices/view-part/?ref=snap
U4 = DeskAssistant v19 v1; AVAILABILITY: In Stock; CHECK_PRICES: https://www.snapeda.com/parts/MAX17048G+T10/Analog+Devices/view-part/?ref=eda; DESCRIPTION: 3µA 1-Cell/2-Cell Fuel Gauge with ModelGauge; MF: Analog Devices; MP: MAX17048G+T10; PACKAGE: TDFN-8 Maxim; PRICE: None; PURCHASE-URL: https://www.snapeda.com/api/url_track_click_mouser/?unipart_id=329239&manufacturer=Analog Devices&part_name=MAX17048G+T10&search_term=None; SNAPEDA_LINK: https://www.snapeda.com/parts/MAX17048G+T10/Analog+Devices/view-part/?ref=snap

## Nets
3V3: C1_BAT2.1 C3.+ C9.1 D7.2 IC1.2 IC4.5 J3.2 J4.P4 Q2.3 R1_PINH1.2 R2.2 R2_PINH1.2 R5.2 R6.2 R7.2 R8.2 R9.2 R10.2 R_BOOT.2 R_CHANGE.2 R_CL1.2 R_RESET.2 TP16.TP U1.3 U1.7 U1.8 U2.2 U3.2
32KHZ [rest]: R2_PINH1.1 U2.9 U3.1
DN [rest]: D1.4 J2.A7 J2.B7
DP [rest]: D1.6 J2.A6 J2.B6
EPD_3V3: C7.1 EPD_C5.2 J1.15 J1.16 L1.2 Q2.2 TP17.TP
EPD_3V3_C: Q2.1 R_CL1.1 TP13.TP U2.18
EPD_BUSY [rest]: J1.9 TP9.TP U2.26
EPD_CS [rest]: D8.2 J1.12 R9.1 TP10.TP U2.11
EPD_DC [rest]: J1.11 TP11.TP U2.5
EPD_RST [rest]: J1.10 TP12.TP U2.21
FLASH_CS [rest]: D9.2 R5.1 U1.1 U2.12
GDR [rest]: J1.2 Q3.1 R4.2
GND [rest]: BOOT_BUTTON.1 BOOT_BUTTON.2 C1.2 C1_BAT1.2 C1_BAT2.2 C1_BAT.2 C2.2 C2_BAT.2 C3.- C4_USB.2 C5.2 C5_USB.2 C6.2 C7.2 C8.2 C9.2 C10.2 C10_SUPERCAP.1 C_DELAY.2 CHANGE_BUTTON.1 CHANGE_BUTTON.2 D1.2 D3.1 D6.1 D8.1 D9.1 D10.1 D11.1 D12.1 EPD_C1.1 EPD_C2.1 EPD_C5.1 EPD_C6.1 EPD_C7.1 EPD_C8.1 EPD_C9.1 EPD_C10.1 EPD_C11.1 EPD_C12.1 IC1.3 IC4.2 J1.8 J1.17 J1.MP1 J1.MP2 J2.A1 J2.A12 J2.B1 J2.B12 J2.MP1 J2.MP2 J2.MP3 J2.MP4 J3.1 J4.G1 J4.G2 J4.G3 J4.G4 J4.P6 MCP73831.2 R1.1 R1_PWRUSB.1 R2_BAT.1 R2_USB1.1 R2_USB.2 R4.1 RESET_BUTTON.1 RESET_BUTTON.2 SENSOR2.1 SENSOR2.5 SENSOR2.7 SJ1.1 TP4.TP TP5.TP U1.4 U1.9 U2.1 U2.28 U2.29_1 U2.29_2 U2.29_3 U2.29_4 U2.29_5 U2.29_6 U2.29_7 U2.29_8 U2.29_9 U3.13 U4.1 U4.4 U4.6 U4.9
GPIO8 [rest]: R2.1 U2.10
I2C_PW [rest]: C1.1 C2.1 R1_PINH.2 R2_PINH.2 SENSOR2.2 SENSOR2.6 SENSOR2.8 U2.17
INT_RTC [rest]: R1_PINH1.1 TP15.TP U2.8 U3.3
IO/BOOT [rest]: BOOT_BUTTON.3 BOOT_BUTTON.4 C6.1 R_BOOT.1 U2.15
IO/CHANGE [rest]: C10.1 CHANGE_BUTTON.3 CHANGE_BUTTON.4 R_CHANGE.1 U2.23
MISO [rest]: D12.2 J4.P7 R8.1 TP6.TP U1.2 U2.27
MOSI [rest]: D11.2 J1.14 J4.P3 R7.1 TP7.TP U1.5 U2.7
N$1 [rest]: J2.A5 R2_USB1.2
N$3 [rest]: EPD_C12.2 J1.24
N$4 [rest]: C1_BAT1.1 D2.1 IC4.1 IC4.3 Q1.2
N$5 [rest]: C4.1 D3.2 D4.1
N$6 [rest]: CHG_LED.C R1_BAT.1
N$7 [rest]: MCP73831.1 R1_BAT.2
N$8 [rest]: J2.B5 R2_USB.1
N$9 [rest]: MCP73831.5 R2_BAT.2
N$10 [rest]: C_DELAY.1 IC1.5
N$11 [rest]: EPD_C10.2 J1.22
N$13 [rest]: EPD_C8.2 J1.20
N$14 [rest]: EPD_C7.2 J1.19
N$15 [rest]: EPD_C6.2 J1.18
N$21 [rest]: D7.1 R_CAPACITOR.1
N$23 [rest]: EPD_C2.2 J1.5
N$24 [rest]: EPD_C1.2 J1.4
PREVGH [rest]: D5.1 EPD_C9.2 J1.21
PREVGL [rest]: D4.2 EPD_C11.2 J1.23
RESE [rest]: J1.3 Q3.2 R3.2
RESE' [rest]: R1.2 R3.1 SJ1.2
RESET [rest]: C5.1 IC1.1 R_RESET.1 RESET_BUTTON.3 RESET_BUTTON.4 U2.3
RTC_RST [rest]: U2.16 U3.4
RX [rest]: TP2.TP U2.24
SCK [rest]: D10.2 J1.13 J4.P5 R6.1 TP8.TP U1.6 U2.6
SCL [rest]: J3.4 R2_PINH.1 SENSOR2.4 U2.20 U3.16 U4.7
SDA [rest]: J3.3 R1_PINH.1 SENSOR2.3 U2.19 U3.15 U4.8
SRC [rest]: C4.2 D5.2 L1.1 Q3.3
SS_SD [rest]: D6.2 J4.P2 R10.1 U2.4
TX [rest]: TP1.TP U2.25
USB_D+ [rest]: D1.1 U2.14
USB_D- [rest]: D1.3 U2.13
VBAT: C2_BAT.1 MCP73831.3 Q1.3 TP3.TP U4.2 U4.3
VBUS: C1_BAT.1 C4_USB.1 C5_USB.1 CHG_LED.A D1.5 D2.2 MCP73831.4 PFMF.050.1.2 Q1.1 R1_PWRUSB.2 TP14.TP
VRTC [rest]: C8.1 C10_SUPERCAP.2 R_CAPACITOR.2 U3.14
VUSB: J2.A4 J2.A9 J2.B4 J2.B9 PFMF.050.1.1

## Tracks (layer width: path | path; a pad name or v marks a point on that pad's centre or on a via)
3V3  (via drill 0.3, 0.35)
  Top 0.127: R9.2 93.03,19.75 93.22,19.75 93.85,20.38 101.41,20.38 102.04,19.75 R8.2 102.11,19.68 102.74,19.05 103.82,19.05 104.46,19.68 109.98,19.68 | 109.98,19.68 110.11,19.68 R7.2 109.98,19.68 | 109.98,19.68 109.98,20.7 110.28,20.7 | 110.28,20.7 v110.28,34.8 | 123.38,32.77 125.48,32.77 C3.+ | 123.38,32.77 121.28,32.77 IC4.5 | 123.38,19.75 127.32,19.75 R5.2 127.38,19.75 128.02,20.38 135.83,20.38 136.46,19.75 136.65,19.75 R10.2 136.72,19.75 139.51,22.54 v147.57,22.54 | 123.38,19.75 119.57,19.75 R6.2 119.51,19.75 118.56,20.7 110.28,20.7 | v151.76,18.35 164.02,18.35 J3.2 | 123.38,19.75 123.38,32.77 | v16.07,36.58 18.29,36.58 R2.2 | v13.14,36.58 8.13,41.59 8.13,41.85 U2.2 | 38.86,49.21 38.86,50.86 37.59,52.13 U1.7 37.59,53.4 U1.8 37.66,53.4 49.34,53.4 62.29,66.36 64.2,66.36 64.83,65.72 D7.2 64.9,65.72 72.58,65.72 | 38.86,49.21 38.86,41.27 53.15,26.99 54.1,26.99 54.74,27.62 R_CL1.2 | 38.86,49.21 31.88,49.21 30.23,50.86 29.84,50.86 U1.3 29.78,50.86 v29.78,50.29 | 3.9,97.06 14.16,107.31 20.26,107.31 R_BOOT.2 | 3.9,97.06 3.81,96.97 3.62,96.97 C9.1 | v3.94,88.96 4.7,88.2 4.83,88.2 J4.P4 | v3.94,96.08 3.94,97.03 3.9,97.06 | 38.89,96.42 38.86,96.46 38.86,100.01 46.35,107.5 R_RESET.2 46.35,107.44 53.09,107.44 53.28,107.63 55.12,107.63 55.18,107.57 R_CHANGE.2 58.55,107.5 v59.56,107.5 | 38.89,96.42 38.99,96.33 39.05,96.33 39.5,95.89 IC1.2 | v77.28,32.32 76.83,31.88 76.45,31.88 Q2.3 | v77.28,45.4 80.01,48.13 80.01,48.39 R1_PINH1.2 80.01,48.07 80.58,48.07 95.09,33.56 107.82,33.56 v109.42,35.16 | 72.58,65.72 76.07,65.72 78.64,63.15 | 78.64,63.15 79.88,61.91 79.88,61.59 U3.2 79.88,61.98 80.71,62.8 81.53,62.8 81.85,62.48 85.79,62.48 R2_PINH1.2
  Top 0.127: 72.61,100.55 72.58,100.52 72.58,65.72 | 72.61,100.55 73.28,101.22 74.3,101.22 75.44,100.08 79.76,100.08 TP16.TP | v76.9,53.59 76.9,53.78 77.98,54.86 77.98,62.48 78.64,63.15 | v66.48,100.58 72.58,100.58 72.61,100.55 | 38.89,96.42 v38.73,96.27
  Bottom 0.127: v110.28,34.8 110.99,35.51 C1_BAT2.1 110.38,36.12 v109.42,35.16 | v147.57,22.54 v151.76,18.35 | v13.14,36.58 v16.07,36.58 v29.78,50.29 | v3.94,88.96 v3.94,96.08 38.54,96.08 v38.73,96.27 | v77.28,32.32 v77.28,45.4 77.28,53.21 v76.9,53.59 | v66.48,100.58 v59.56,107.5
32KHZ  (via drill 0.3)
  Top 0.15: 81.85,61.21 81.53,61.21 81.22,61.53 U3.1 | 81.85,61.21 85.79,61.21 R2_PINH1.1 | v35.43,61.15 17.02,42.74 17.02,41.91 U2.9 | v81.85,61.15 81.85,61.21
  Bottom 0.15: v81.85,61.15 v35.43,61.15
DN
  Top 0.15: J2.A7 162.43,53.78 163,53.78 163.19,53.59 163.19,53.02 163,52.83 162.43,52.83 J2.B7 162.37,52.77 161.8,52.77 161.54,52.51 149.37,52.51 D1.4
DP
  Top 0.15: 161.61,54.04 161.61,53.59 161.86,53.34 162.37,53.34 J2.A6 | 161.61,54.04 161.86,54.29 162.37,54.29 J2.B6 | D1.6 149.34,54.36 151.96,55.37 160.21,55.37 161.54,54.04 161.61,54.04
EPD_3V3  (via drill 0.3)
  Top 0.127: J1.16 75.31,14.92 75.75,14.92 J1.15 75.75,14.99 75.75,15.24 76.71,16.19 76.71,20.57 77.47,21.34 77.47,22.04 EPD_C5.2 77.47,22.1 77.47,22.29 76.83,22.92 v75.75,22.92 | v72.26,37.02 72.26,38.04 C7.1 | 72.8,32.42 74.3,30.92 Q2.2 | 72.8,32.42 v72.26,32.96 | 72.8,32.42 81.15,40.77 86.11,40.77 TP17.TP | v66.93,28.07 64.77,28.07 L1.2
  Bottom 0.127: v72.26,32.96 v72.26,37.02 | v75.75,22.92 75.75,29.46 v72.26,32.96 | v66.93,28.07 71.75,32.89 72.26,32.89 v72.26,32.96
EPD_3V3_C  (via drill 0.3)
  Top 0.127: 58.33,32.1 62.36,36.13 67.75,36.13 68.45,35.43 68.45,32.96 67.88,32.38 67.88,31.37 69.47,29.78 79.57,29.78 81.28,31.5 81.28,32.38 81.25,32.42 | 58.33,32.1 53.91,27.69 53.66,27.69 R_CL1.1 | 81.25,32.42 80.9,32.77 74.36,32.77 Q2.1 | v22.04,55.05 19.56,57.53 19.56,59.31 U2.18 | v58.29,32.13 58.33,32.1 | v126.17,57.34 132.78,63.94 135.57,63.94 136.78,62.74 140.4,62.74 TP13.TP | 81.25,32.42 v81.41,32.58
  Bottom 0.127: v22.04,55.05 24.77,55.05 28.45,51.37 39.05,51.37 v58.29,32.13 | v126.17,57.34 106.17,57.34 v81.41,32.58
EPD_BUSY  (via drill 0.3)
  Top 0.15: v78.74,13.97 78.74,14.86 J1.9 | v10.22,58.23 9.4,59.05 9.4,59.31 U2.26 | v7.62,61.28 4.13,64.77 TP9.TP
  Bottom 0.15: v78.74,13.97 78.55,13.97 78.42,14.1 77.09,14.1 37.08,54.1 26.54,54.1 24.83,55.82 18.99,55.82 18.86,55.69 12.76,55.69 v10.22,58.23 10.22,58.29 7.62,60.9 v7.62,61.28
EPD_CS  (via drill 0.3)
  Top 0.15: v81.34,13.91 80.96,13.53 78.3,13.53 77.34,14.48 77.34,14.86 J1.12 | v86.49,19.05 93.66,19.05 94.3,19.68 R9.1 | v95,15.56 96.52,14.03 127.76,14.03 128.91,12.89 129.16,12.89 D8.2 | v29.46,54.55 19.56,44.64 19.56,41.91 U2.11 | v124.71,56.52 132.46,64.26 147,64.26 148.53,62.74 153.1,62.74 TP10.TP
  Bottom 0.15: v29.46,54.55 37.08,54.55 77.22,14.41 80.77,14.41 81.28,13.91 v81.34,13.91 v86.49,19.05 86.55,19.05 90.04,15.56 v95,15.56 95,15.62 124.71,45.34 v124.71,56.52
EPD_DC  (via drill 0.3)
  Top 0.15: v77.85,21.08 77.85,14.92 J1.11 | v86.36,58.61 86.36,60.64 86.49,60.77 86.49,87.38 73.85,100.01 TP11.TP | v26.35,56.58 11.94,42.16 11.94,41.91 U2.5
  Bottom 0.15: v77.85,21.08 77.85,50.1 79.72,51.98 | v86.36,58.61 79.72,51.98 | v26.35,56.58 75.12,56.58 79.72,51.98
EPD_RST  (via drill 0.3)
  Top 0.15: v78.3,15.68 J1.10 | v18.67,56.13 15.75,59.05 15.75,59.31 U2.21 | v124.27,56.9 131.95,64.58 153.03,64.58 154.37,63.25 154.37,62.17 153.67,61.47 149.35,61.47 148.15,62.67 146.81,62.67 TP12.TP
  Bottom 0.15: v18.67,56.13 35.94,56.13 76.39,15.68 v78.3,15.68 78.36,15.68 119.57,56.9 v124.27,56.9
FLASH_CS  (via drill 0.3)
  Top 0.15: v123.7,14.8 128.59,19.68 R5.1 | v122.56,13.59 121.79,12.83 D9.2 | v28.89,52.51 29.78,53.4 U1.1 | v28,52.45 28,49.34 27.27,48.61 | 27.27,48.61 20.83,42.16 20.83,41.91 U2.12 | 27.27,48.61 v28,47.88
  Bottom 0.15: v123.7,14.8 122.56,13.65 v122.56,13.59 111,13.59 109.86,12.45 63.44,12.45 v28,47.88 | v28.89,52.51 28.07,52.51 v28,52.45
GDR  (via drill 0.3)
  Top 0.15: v75.75,13.08 76.26,12.57 81.09,12.57 82.23,13.72 82.23,14.86 J1.2 | Q3.1 63.31,20.89 63.63,20.57 v63.63,20 63.56,20 58.48,14.92 57.53,14.92 R4.2
  Bottom 0.15: v75.75,13.08 68.83,20 v63.63,20
GND  (via drill 0.3, 0.35)
  Top 0.15: RESET_BUTTON.1 48.83,106.68 52.26,106.68 RESET_BUTTON.2 52.39,106.74 52.64,107 54.61,107 C_DELAY.2 54.67,107 56.01,107 57.47,105.54 | C10.2 67.06,107.5 65.28,107.5 64.33,106.55 CHANGE_BUTTON.2 64.26,106.62 60.83,106.62 CHANGE_BUTTON.1 60.77,106.55 59.75,105.54 57.47,105.54 | 28.89,105.47 29.08,105.66 29.08,106.49 28.38,107.19 28.38,107.31 C6.2 | 28.89,105.47 27.24,105.47 26.1,106.62 BOOT_BUTTON.2 26.04,106.62 22.61,106.62 BOOT_BUTTON.1 | 54.93,93.6 55.63,93.6 C5.2 | 54.93,93.6 42.61,93.6 41.34,94.87 39.56,94.87 IC1.3 | IC1.3 39.56,94.81 29.53,84.77 29.53,78.8 TP4.TP 29.46,79.06 v26.67,79.06 | 28.89,105.47 28.89,105.41 39.5,94.81 IC1.3 | 57.47,105.54 57.47,92.96 56.2,91.69 55.05,91.69 54.93,91.82 54.93,93.6 | U2.29_6 12.57,50.29 12.57,49.15 U2.29_5 12.64,49.15 13.78,49.15 U2.29_8 | U2.29_8 13.78,49.21 13.78,50.29 U2.29_9 13.84,50.35 v17.34,50.35 | U2.29_1 11.3,47.88 11.3,49.09 U2.29_2 11.3,49.15 11.3,50.29 U2.29_3 11.24,50.42 6.86,54.8 6.86,59.31 U2.28 6.79,59.37 6.79,60.33 1.27,65.85 1.27,80.01 J4.G3 1.27,80.07 1.27,87 4.7,90.42 J4.P6 4.83,90.36 4.32,90.87 4.25,90.87 2.29,92.84 2.29,93.15 J4.G4 2.29,93.22 4.83,95.76 | U2.29_1 11.37,47.88 12.51,47.88 U2.29_4 12.57,47.88 13.78,47.88 U2.29_7 13.78,47.94 13.78,49.09 U2.29_8 | U2.1 6.86,41.91 6.86,43.43 11.24,47.82 U2.29_1 | 14.67,87.95 14.67,84.9 15.43,84.14 15.43,83.06 J4.G1 15.49,83 19.68,78.8 24.38,78.8 TP5.TP 24.45,78.8 24.7,79.06 v25.78,79.06 | 14.67,87.95 15.43,88.71 J4.G2 | 4.83,95.76 4.83,96.9 C9.2 | 14.67,87.95 12.7,87.95 4.89,95.76 4.83,95.76 | 147.57,19.3 148.34,18.54 SENSOR2.7
  Top 0.15: 147.57,19.3 147.57,20.83 SENSOR2.1 147.57,20.89 147.57,21.14 148.02,21.59 | 148.02,21.59 150.24,21.59 150.43,21.4 150.43,20.32 149.99,19.88 149.99,17.97 SENSOR2.5 149.99,17.91 149.99,14.48 155.07,9.4 C2.2 155.07,9.34 157.61,9.34 C1.2 157.61,9.4 164.02,15.81 164.02,17.27 J3.1 | J1.MP1 83.82,12.45 92.01,12.45 92.39,12.83 D12.1 92.46,12.83 92.71,12.83 93.34,12.19 99.44,12.19 100.58,13.34 101.54,13.34 101.98,12.89 D11.1 102.11,12.89 102.3,12.89 103.12,13.72 110.81,13.72 111.63,12.89 D10.1 111.7,12.89 112.39,13.59 113.73,13.59 114.43,12.89 120.27,12.89 D9.1 120.33,12.83 120.59,12.83 121.22,12.19 127,12.19 127.64,12.83 D8.1 127.7,12.83 128.33,12.19 129.73,12.19 130.3,12.76 135.51,12.76 D6.1 135.57,12.76 136.27,12.06 137.6,12.06 144.84,19.3 147.57,19.3 | 79.31,22.99 78.61,22.99 EPD_C2.1 78.55,22.99 77.98,22.99 77.6,23.37 EPD_C5.1 77.47,23.37 76.64,23.37 76.52,23.5 EPD_C6.1 76.45,23.56 76.45,24.38 75.37,25.46 EPD_C7.1 75.37,25.53 74.42,24.57 EPD_C8.1 74.36,24.51 73.6,24.51 73.34,24.26 EPD_C9.1 73.28,24.26 73.22,24.32 72.2,24.32 EPD_C10.1 72.14,24.32 71.5,23.69 71.18,23.69 EPD_C11.1 71.12,23.62 70.87,23.37 70.1,23.37 EPD_C12.1 | 79.31,22.99 80.14,22.99 EPD_C1.1 | 29.08,50.35 U1.4 29.84,49.59 29.84,31.43 40.45,20.83 SJ1.1 40.51,20.77 40.51,20.57 47.43,13.65 57.47,13.65 R4.1 57.53,13.59 58.67,12.45 70.23,12.45 J1.MP2 70.36,12.45 70.8,12.89 v73.15,12.89 | 29.08,50.35 29.08,51.18 29.4,51.5 33.66,51.5 U1.9 | v74.23,13.97 74.74,14.48 74.74,14.86 J1.17 74.8,14.99 74.8,15.3 75.95,16.45 v76.26,16.45 | v78.3,16.32 79.25,15.37 79.25,14.92 J1.8
  Top 0.15: v79.31,22.29 79.31,22.99 | C8.2 84.77,53.28 83.82,53.28 81.53,50.99 79.57,50.99 79.18,51.37 79.18,53.34 78.99,53.53 78.36,53.53 77.41,52.58 77.41,52.26 U3.13 77.41,52.2 77.41,48.64 78.36,47.69 | 89.92,51.05 89.92,52.9 88.71,54.1 C10_SUPERCAP.1 | 89.92,51.05 87.95,49.09 79.63,49.09 79.38,48.83 79.38,47.88 79.18,47.69 78.36,47.69 | 69.94,34.07 72.9,37.02 72.9,38.67 72.26,39.31 C7.2 72.2,39.43 72.2,40.96 78.36,47.12 78.36,47.69 | 69.94,34.07 68.45,32.58 R1.1 | 79.31,31.94 77.72,31.94 76.01,30.23 73.79,30.23 69.94,34.07 | 79.31,31.94 80.45,31.94 D3.1 | J2.MP1 166.94,48.45 166.94,58.61 J2.MP2 166.88,58.67 163,58.67 J2.MP4 162.94,58.61 162.43,58.1 162.43,56.96 J2.A12 162.43,56.9 162.43,56.64 J2.B1 162.37,56.58 153.29,56.58 152.84,56.13 C4_USB.2 152.78,56.07 149.73,56.07 147.13,53.47 146.63,53.47 D1.2 | J2.B12 162.43,50.48 162.43,50.23 J2.A1 162.43,50.16 162.43,48.96 162.94,48.45 J2.MP3 162.37,48.96 154.69,48.96 149.54,43.81 148.46,43.81 147.83,44.45 R2_USB1.1 | R2_USB1.1 147.76,44.51 147.76,48.2 148.08,48.51 R2_USB.2 148.08,48.58 148.08,49.85 | C5_USB.2 140.72,51.24 143.45,51.24 145.54,53.34 146.36,53.34 D1.2 | 148.08,49.85 148.08,52.39 147.36,53.1 D1.2 | U4.9 134.05,50.42 134.05,50.29 133.48,49.72 133.16,49.72 U4.4 133.1,49.66 133.1,48.32 129.89,45.12 | U4.9 134.11,50.48 133.48,51.12 133.16,51.12 U4.1 133.1,51.24 130.11,54.23 128.71,54.23 C2_BAT.2 | U4.9 134.05,50.23 135.06,50.23 U4.6 135.13,50.16 135.38,50.16 136.53,49.02 141.35,49.02 142.18,49.85 148.08,49.85 | 129.89,45.12 129.73,44.96 128.65,44.96 127.95,45.66 126.94,45.66 MCP73831.2
  Top 0.15: 129.89,45.12 130.87,44.13 130.87,43.05 130.62,42.8 130.62,38.23 C1_BAT.2 130.56,38.16 127.89,38.16 127.06,37.34 C3.- 126.94,37.27 118.43,37.27 | v112.01,34.04 112.01,30.29 | 112.01,30.29 112.01,27.05 R1_PWRUSB.1 | 112.01,30.29 118.94,30.29 119.13,30.48 119.13,31.24 118.62,31.75 118.49,31.75 IC4.2 118.62,31.81 119.13,32.32 119.13,33.08 118.43,33.78 118.43,37.27 | 118.43,37.27 118.43,39.31 119.06,39.94 119.06,40.07 C1_BAT1.2 | v108.58,37.47 108.58,45.21 110.24,46.86 110.24,48.58 R2_BAT.1 110.24,48.7 107.89,51.05 89.92,51.05 | v79.31,31.88 79.31,31.94 | 148.02,21.59 148.02,33.08 144.21,36.89 144.21,40.96 147.7,44.45 R2_USB1.1 | v29.02,50.35 29.08,50.35
  Bottom 0.15: v25.78,79.06 v26.67,79.06 | v73.15,12.89 v74.23,13.97 | v76.26,16.45 76.39,16.32 v78.3,16.32 78.3,16.38 79.31,17.4 v79.31,22.29 v79.31,31.88 | v108.58,37.47 110.69,37.47 C1_BAT2.2 110.75,37.42 112.2,36.73 112.01,36.28 v112.01,34.04 | v29.02,50.35 v17.34,50.35
GPIO8
  Top 0.15: R2.1 18.35,35.24 18.35,35.43 18.99,36.07 18.99,40.89 18.29,41.59 18.29,41.85 U2.10
I2C_PW  (via drill 0.3)
  Top 0.15: 148.08,17.21 147.57,17.72 147.57,17.91 SENSOR2.8 | 148.08,17.21 148.65,17.21 149.1,17.65 149.1,17.91 SENSOR2.6 149.16,18.03 149.16,18.16 148.4,18.92 148.4,20.83 SENSOR2.2 | C1.1 157.61,8 155.07,8 C2.1 155,8 154.24,8 152.59,9.65 152.27,9.65 v152.21,9.84 152.21,9.65 151.76,9.21 R1_PINH.2 151.76,9.14 147.76,9.14 R2_PINH.2 148.08,9.21 148.08,17.21 | v22.92,61.72 20.83,59.63 20.83,59.37 U2.17
  Bottom 0.15: v22.92,61.72 57.66,61.72 57.98,62.04 129.98,62.04 140.91,51.12 140.91,29.84 152.21,18.54 v152.21,9.84
INT_RTC  (via drill 0.3)
  Top 0.15: 86.77,54.01 80.45,60.33 79.57,60.33 79.09,60.8 | 86.77,54.01 87.57,53.21 89.09,53.21 89.6,52.7 89.6,51.18 88.77,50.35 80.45,50.35 78.8,48.7 78.8,48.45 R1_PINH1.1 | 79.09,60.8 78.68,61.21 78.68,61.53 U3.3 | v33.47,59.88 15.75,42.16 15.75,41.91 U2.8 | 79.09,60.8 v78.42,60.13 | 86.77,54.01 95.44,62.67 127.7,62.67 TP15.TP
  Bottom 0.15: v33.47,59.88 78.17,59.88 v78.42,60.13
IO/BOOT
  Top 0.15: C6.1 28.32,106.11 28.13,106.11 26.1,108.14 BOOT_BUTTON.3 26.04,108.14 22.61,108.14 BOOT_BUTTON.4 22.54,108.14 20.51,106.11 20.32,106.11 R_BOOT.1 20.51,106.05 26.23,100.33 26.23,78.87 23.37,76.01 23.37,59.37 U2.15
IO/CHANGE  (via drill 0.3)
  Top 0.15: C10.1 67.12,106.3 67.12,106.49 67.75,107.12 67.75,107.95 67.56,108.14 64.33,108.14 CHANGE_BUTTON.3 64.26,108.08 60.83,108.08 CHANGE_BUTTON.4 60.77,108.08 58.99,106.3 58.55,106.3 R_CHANGE.1 58.42,106.24 58.17,105.98 v57.66,105.98 | v17.27,64.33 13.21,60.26 13.21,59.37 U2.23
  Bottom 0.15: v17.27,64.33 17.27,65.6 v57.66,105.98
MISO  (via drill 0.3)
  Top 0.15: v96.14,13.78 94.87,13.78 93.98,12.89 D12.2 | R8.1 103.38,19.75 v102.74,20.38 101.79,20.38 87.38,34.8 v75.82,34.8 | v29.78,52.77 U1.2 | v19.18,55.37 11.81,55.37 8.13,59.05 8.13,59.31 U2.27 8.06,59.37 8.06,88.58 | 8.06,88.58 5.21,91.44 J4.P7 | v26.67,90.74 29.27,90.74 TP6.TP | v8.13,88.58 8.06,88.58 | v38.42,51.94 v40.77,51.94
  Bottom 0.15: v96.14,13.78 v102.74,20.38 | v19.18,55.37 19.3,55.5 24.7,55.5 26.42,53.78 28.26,53.78 29.27,52.77 v29.78,52.77 29.84,52.77 30.67,51.94 v38.42,51.94 | v26.67,90.74 10.29,90.74 v8.13,88.58 | v75.82,34.8 58.67,51.94 v40.77,51.94
MOSI  (via drill 0.3)
  Top 0.15: 76.33,14.16 76.33,13.59 76.58,13.34 v77.85,13.34 | 76.33,14.16 76.33,14.86 J1.14 | v100.78,12.89 101.47,12.19 102.87,12.19 103.5,12.83 D11.2 | v111.44,14.48 111.44,19.68 R7.1 | 33.91,61.59 35.62,61.59 35.88,61.34 35.88,51.12 37.34,49.66 37.53,49.66 U1.5 37.66,49.66 v38.42,49.66 | 33.91,61.59 14.48,42.16 14.48,41.91 U2.7 14.48,41.85 14.48,37.53 22.23,29.78 TP7.TP | v6.73,87.06 J4.P3 | v24.83,73.79 24.83,70.74 33.91,61.66 33.91,61.59 | v75.75,14.16 76.33,14.16
  Bottom 0.15: v77.85,13.34 78.3,13.34 78.74,12.89 v100.78,12.89 100.78,12.83 109.79,12.83 v111.44,14.48 | v6.73,87.06 7.24,87.06 7.43,87.25 11.37,87.25 v24.83,73.79 | v75.75,14.16 75.56,14.16 40.07,49.66 v38.42,49.66
N$1
  Top 0.15: R2_USB1.2 149.1,44.51 149.8,44.51 157.48,52.2 162.31,52.2 162.37,52.26 J2.A5
N$2
  pour Top: 67.96,10.06 67.98,10.08 86.42,10.08 86.44,10.06 86.46,10.04 86.48,10.02 86.48,0.08 168.92,0.08 168.92,65.92 90.98,65.92 90.96,65.94 90.94,65.96 90.92,65.98 90.92,109.92 70.08,109.92 70.08,108.98 70.06,108.96 70.04,108.94 70.02,108.92 19.98,108.92 19.96,108.94 19.94,108.96 19.92,108.98 19.92,109.92 0.08,109.92 0.08,0.08 67.92,0.08 67.92,10.02 67.94,10.04
  pour Bottom: 67.96,10.06 67.98,10.08 86.42,10.08 86.44,10.06 86.46,10.04 86.48,10.02 86.48,0.08 168.92,0.08 168.92,65.92 90.98,65.92 90.96,65.94 90.94,65.96 90.92,65.98 90.92,109.92 70.08,109.92 70.08,108.98 70.06,108.96 70.04,108.94 70.02,108.92 19.98,108.92 19.96,108.94 19.94,108.96 19.92,108.98 19.92,109.92 0.08,109.92 0.08,0.08 67.92,0.08 67.92,10.02 67.94,10.04
N$3
  Top 0.15: J1.24 71.25,14.92 71.25,20.89 70.1,22.04 EPD_C12.2
N$4
  Top 0.15: 117.73,32.13 117.73,31.43 118.3,30.86 118.43,30.86 IC4.3 | 117.73,32.13 118.3,32.7 118.43,32.7 IC4.1 118.3,32.77 118.11,32.96 118.11,40.26 118.56,40.7 119.63,40.7 119.76,40.58 | D2.1 113.28,32.58 117.22,32.58 117.67,32.13 117.73,32.13 | 119.76,40.58 119.76,39.69 119.13,39.05 119.13,38.86 C1_BAT1.1 | 119.76,40.58 127.7,40.58 130.18,43.05 130.18,43.5 Q1.2
N$5  (via drill 0.3)
  Top 0.15: v71.37,37.97 64.45,44.9 64.45,45.34 C4.1 | v76.77,33.21 82.74,33.21 83.95,32 D3.2 84.01,31.94 84.14,31.94 87.63,28.45 87.63,27.5 87.44,27.3 85.66,27.3 85.03,27.94 D4.1
  Bottom 0.15: v71.37,37.97 72.01,37.97 v76.77,33.21
N$6
  Top 0.15: CHG_LED.C 116.59,48.7 113.41,48.7 110.36,45.66 109.92,45.66 109.16,44.9 109.16,44.64 R1_BAT.1
N$7
  Top 0.15: R1_BAT.2 110.49,44.64 123,44.64 123.64,45.28 125.79,45.28 126.3,44.77 126.87,44.77 MCP73831.1
N$8  (via drill 0.3)
  Top 0.15: v147.64,49.4 146.81,48.58 R2_USB.1 | v161.48,54.93 161.86,55.31 162.37,55.31 J2.B5
  Bottom 0.15: v147.64,49.4 155.96,49.4 v161.48,54.93
N$9
  Top 0.15: R2_BAT.2 111.57,48.64 112.9,48.64 113.67,49.4 117.03,49.4 117.22,49.21 117.22,48.26 114.3,45.34 110.05,45.34 109.86,45.15 109.86,44.07 109.98,43.94 123.51,43.94 124.27,44.7 MCP73831.5
N$10
  Top 0.15: IC1.5 42.35,96.84 45.72,96.84 54.61,105.73 C_DELAY.1
N$11
  Top 0.15: J1.22 72.26,14.92 72.26,22.92 72.2,22.99 EPD_C10.2
N$13
  Top 0.15: J1.20 73.34,14.92 73.34,21.78 74.36,22.8 74.36,23.24 EPD_C8.2
N$14
  Top 0.15: J1.19 73.85,14.92 73.85,21.65 75.37,23.18 75.37,24.26 EPD_C7.2
N$15
  Top 0.15: J1.18 74.3,20 76.45,22.16 EPD_C6.2
N$21
  Top 0.15: R_CAPACITOR.1 72.71,65.02 63.44,65.02 62.8,65.66 D7.1
N$23
  Top 0.15: J1.5 80.77,14.92 80.77,19.49 78.61,21.65 EPD_C2.2
N$24
  Top 0.15: J1.4 81.28,20.57 80.2,21.65 EPD_C1.2
PREVGH
  Top 0.15: EPD_C9.2 73.28,22.86 72.83,22.42 72.83,14.92 J1.21 72.77,14.86 72.77,14.54 72.52,14.29 71.06,14.29 69.09,16.26 69.09,27.18 64.2,32.07 64.2,34.92 D5.1
PREVGL
  Top 0.15: J1.23 71.75,14.92 71.75,21.72 71.12,22.35 EPD_C11.2 71.06,22.35 70.8,22.61 69.72,22.61 69.41,22.92 69.41,23.81 74.17,28.57 84.84,28.57 85.41,28 86.81,28 D4.2
RESE
  Top 0.15: J1.3 81.79,14.86 81.79,13.72 80.96,12.89 76.58,12.89 75.95,13.53 67.69,13.53 65.6,15.62 R3.2 65.53,15.68 64.64,16.57 64.64,20.89 Q3.2
RESE'  (via drill 0.3)
  Top 0.15: 64.07,14.35 48.45,14.35 42.04,20.77 SJ1.2 | 64.07,14.35 65.53,14.35 R3.1 | v69.72,30.23 69.72,31.81 R1.2 | v66.1,26.61 66.1,23.5 64.07,21.46 64.07,14.35
  Bottom 0.15: v66.1,26.61 v69.72,30.23
RESET  (via drill 0.3)
  Top 0.15: RESET_BUTTON.3 RESET_BUTTON.4 48.77,108.14 48.01,108.14 v47.75,107.89 | R_RESET.1 46.35,106.24 39.56,99.44 39.56,96.84 IC1.1 39.62,96.84 40.2,96.27 40.39,96.27 | 40.39,96.27 54.04,96.27 56.33,93.98 56.33,93.15 55.69,92.52 55.69,92.27 C5.1 | v24.38,76.39 24.38,56.77 14.86,47.24 14.22,47.24 9.4,42.42 9.4,41.91 U2.3 | v40.39,96.2 40.39,96.27
  Bottom 0.15: v24.38,76.39 24.38,80.2 v40.39,96.2 40.39,96.27 47.75,103.63 v47.75,107.89
RTC_RST  (via drill 0.3)
  Top 0.15: v22.92,60.52 22.1,59.69 22.1,59.37 U2.16 | v75.56,60.33 76.45,60.33 77.34,61.21 77.34,61.53 U3.4
  Bottom 0.15: v22.92,60.52 75.37,60.52 v75.56,60.33
RX
  Top 0.15: U2.24 11.94,59.37 11.94,59.63 17.08,64.77 19.62,64.77 TP2.TP
SCK  (via drill 0.3)
  Top 0.15: v76.77,13.78 76.77,14.86 J1.13 | v109.6,13.27 109.98,13.27 111.06,12.19 112.52,12.19 113.16,12.83 D10.2 | v115.95,19.68 118.24,19.68 R6.1 | v7.62,86.81 5.21,89.22 5.08,89.22 J4.P5 | v13.14,81.28 13.14,72.07 TP8.TP | v36.7,50.93 37.53,50.93 U1.6 | v21.97,50.93 13.21,42.16 13.21,41.91 U2.6
  Bottom 0.15: v115.95,19.68 109.6,13.34 v109.6,13.27 109.54,13.34 78.74,13.34 78.3,13.78 v76.77,13.78 76.01,13.78 75.95,13.72 75.56,13.72 40.07,49.21 38.23,49.21 36.58,50.86 v36.7,50.93 v21.97,50.93 16.89,50.93 7.18,60.64 7.18,61.47 13.14,67.44 v13.14,81.28 v7.62,86.81
SCL  (via drill 0.3)
  Top 0.15: v136.72,49.47 135.57,50.61 135.13,50.61 U4.7 | v149.48,20 149.48,20.19 149.92,20.64 149.92,20.83 SENSOR2.4 | R2_PINH.1 147.76,7.87 v148.78,7.87 148.84,7.87 149.67,7.05 158.31,7.05 165.29,14.03 165.29,19.37 164.34,20.32 J3.4 | v19.05,57.02 17.02,59.05 17.02,59.31 U2.20 | v80.52,53.47 80.52,52.9 81.15,52.26 U3.16
  Bottom 0.15: v148.78,7.87 149.48,8.57 v149.48,20 136.72,32.77 v136.72,49.47 136.72,50.74 128.4,59.05 86.17,59.05 80.58,53.47 v80.52,53.47 78.87,53.47 75.31,57.02 v19.05,57.02
SDA  (via drill 0.3)
  Top 0.15: v19.11,58.23 18.29,59.05 18.29,59.31 U2.19 | 79.66,53.31 79.88,53.09 79.88,52.26 U3.15 | 79.66,53.31 v78.99,53.98 | J3.3 164.08,19.3 164.34,19.3 164.97,18.67 164.97,14.16 158.18,7.37 154.43,7.37 153.99,7.81 151.83,7.81 R1_PINH.1 151.7,7.81 149.86,7.81 v148.97,8.7 | v136.27,50.55 135.7,51.12 135.13,51.12 U4.8 | v148.84,20 148.84,20.57 149.1,20.83 SENSOR2.3 | 79.66,53.31 80.26,53.91 v86.23,53.91
  Bottom 0.15: v19.11,58.23 74.74,58.23 v78.99,53.98 | v148.97,8.7 148.97,19.81 148.84,19.94 v148.84,20 136.27,32.58 v136.27,50.55 136.21,50.55 128.97,57.78 106.24,57.78 102.36,53.91 v86.23,53.91
SRC  (via drill 0.3)
  Top 0.15: Q3.3 63.88,23.05 63.88,24.32 60.2,28 L1.1 60.2,28.07 60.2,32.32 63.56,35.69 v66.86,35.69 67.63,34.92 D5.2 | v65.79,44.2 65.79,45.34 C4.2
  Bottom 0.15: v65.79,44.2 65.79,36.77 v66.86,35.69
SS_SD  (via drill 0.3)
  Top 0.15: 135.45,14.35 135.45,19.68 R10.1 | 135.45,14.35 136.97,12.83 D6.2 | v10.6,42.99 10.6,41.91 U2.4 10.67,41.85 10.67,41.59 13.59,38.67 13.59,29.72 31.5,11.81 80.77,11.81 84.96,16 107.57,16 110.74,19.18 110.74,20.13 111,20.38 111.89,20.38 117.92,14.35 135.45,14.35 | v6.22,85.22 5.52,85.92 J4.P2
  Bottom 0.15: v10.6,42.99 10.6,56.77 6.22,61.15 v6.22,85.22
TX
  Top 0.15: U2.25 10.67,59.37 10.67,61.78 13.65,64.77 TP1.TP
USB_D+  (via drill 0.3)
  Top 0.15: v137.03,54.36 142.74,54.36 D1.1 | v58.17,61.59 57.91,61.59 45.09,48.77 v39.31,48.77 | v29.02,47.56 23.37,41.91 U2.14
  Bottom 0.15: v137.03,54.36 133.99,54.36 126.75,61.59 v58.17,61.59 | v39.31,48.77 30.23,48.77 v29.02,47.56
USB_D-  (via drill 0.3)
  Top 0.15: v137.16,50.74 138.56,49.34 141.22,49.34 142.05,50.16 142.81,50.16 144.85,52.2 D1.3 | v34.92,59.37 29.46,53.91 29.27,53.91 28.45,53.09 28.45,47.69 23.62,42.86 22.8,42.86 22.1,42.16 22.1,41.91 U2.13
  Bottom 0.15: v137.16,50.74 128.52,59.37 v34.92,59.37
VBAT
  Top 0.127: Q1.3 129.22,45.72 128.27,45.72 127.38,46.61 126.94,46.61 MCP73831.3 127.44,46.61 127.44,53.02 127.48,53.05 | U4.3 133.16,50.23 133.16,50.61 U4.2 133.1,50.67 132.84,50.67 130.56,52.96 128.71,52.96 C2_BAT.1 128.65,53.02 127.51,53.02 127.48,53.05 | 127.48,53.05 123.76,56.77 105.6,56.77 TP3.TP
VBUS  (via drill 0.3)
  Top 0.127: CHG_LED.A 118.11,48.7 122.24,48.7 124.27,46.67 MCP73831.4 124.33,46.61 124.84,46.61 126.24,45.21 127.64,45.21 127.76,45.09 127.76,43.5 | 127.76,43.5 128.27,43.5 Q1.1 128.33,43.5 v129.16,42.67 | 127.76,43.5 120.97,43.5 113.28,35.81 113.28,34.73 D2.2 | R1_PWRUSB.2 113.41,27.05 116.08,27.05 120.59,31.56 120.59,33.15 123.51,36.07 129.73,36.07 C1_BAT.1 130.62,36.96 132.75,39.08 | C4_USB.1 152.78,54.8 151.76,54.8 149.82,53.69 149.82,53.67 149.71,53.56 149.49,53.56 D1.5 149.01,53.34 v147.76,53.34 | TP14.TP 135.13,62.67 135.13,55.63 140.65,50.1 140.65,49.91 C5_USB.1 140.72,49.91 v141.35,50.55 | v149.67,42.29 149.67,38.86 PFMF.050.1.2 | v142.75,49.09 132.75,39.08 | v132.72,39.12 132.75,39.08
  Bottom 0.127: v147.76,53.34 144.15,53.34 v141.35,50.55 141.41,50.55 142.78,49.18 | 142.78,49.18 v149.67,42.29 | v142.75,49.09 142.75,49.15 142.78,49.18 | v132.72,39.12 v129.16,42.67
VRTC  (via drill 0.3)
  Top 0.15: C10_SUPERCAP.2 88.65,51.94 84.84,51.94 C8.1 84.77,51.94 82.93,51.94 81.66,50.67 78.42,50.67 78.04,51.05 v77.98,51.05 77.98,51.56 78.61,52.2 U3.14 | v76.77,54.29 74.11,56.96 74.11,65.02 R_CAPACITOR.2
  Bottom 0.15: v76.77,54.29 77.03,54.04 77.09,54.04 77.98,53.15 v77.98,51.05
VUSB
  Top 0.127: J2.A4 162.43,51.05 162.43,51.31 J2.B9 162.5,51.31 162.94,51.31 163.35,51.72 | J2.A9 162.43,56.07 162.43,55.82 J2.B4 162.5,55.82 162.94,55.82 163.51,55.24 163.51,51.88 163.35,51.72 | 163.35,51.72 164.21,50.86 164.21,47.31 159.64,42.74 149.1,42.74 145.22,38.86 PFMF.050.1.1